# EAGLE board riffle-0.96-oneSideHole (EAGLE 7.3.0)

Size 100.1 x 18.03 mm. Coordinates in mm from the lower left corner, seen from the top.
Outline: 100.09,18.03 100.09,0.03 0,0 0,18.01 15.11,17.98
Outline: 15.11,17.98 100.1,18.03
Outline: 15.14,17.98 15.11,17.98
Copper layers (1*16): Top 0.0356mm / dielectric 1.5011mm / Bottom 0.0356mm
Design rules "LaenPCBOrder": minimum track width 6mil, minimum drill 13mil, track to track 6mil, track to pad 6mil, pad to pad 6mil, via to via 6mil, smd to smd 6mil, copper to edge 15mil, drill to drill 6mil, minimum pad ring 7mil, minimum via ring 7mil, stop-mask expansion 3mil, vias tented up to drill 0mil, thermal gap 10mil
Holes 2 mm at 16.81,1.45 16.41,9.27

## Footprints (pad centres in the part's own frame; a part is rotated, then mirrored left to right if it is on the bottom)
BATTCON_12MM_SMT = smd 2.4 x 4.3: P$1 0,11.96 | smd 2.4 x 4.2: P$2 0,-4.1 | hole 0.95: 0,7.5 | hole 1.25: 0,0
SOT-23 = smd 0.787 x 0.889: 1 0.025,-1.016; 2 -0.94,1.016; 3 0.991,1.016
0603-CAP = smd 1.1 x 1: 1 -0.85,0; 2 0.85,0
JST-PH-2-SMT-RA = smd 1 x 4.6: 1 1,-3.7; 2 -1,-3.7 | smd 1.6 x 3.4: NC1 -3.4,1.5; NC2 3.4,1.5
0603-LED = smd 0.8 x 0.9: MINUS -0.85,0; PLUS 0.85,0
SOD-123FL = smd 0.91 x 1.22: A 1.637,0; C -1.637,0
TQFP32-08 = smd 1.27 x 0.559: 1 -4.293,2.8; 2 -4.293,2; 3 -4.293,1.2; 4 -4.293,0.4; 5 -4.293,-0.4; 6 -4.293,-1.2; 7 -4.293,-2; 8 -4.293,-2.8; 17 4.293,-2.8; 18 4.293,-2; 19 4.293,-1.2; 20 4.293,-0.4; 21 4.293,0.4; 22 4.293,1.2; 23 4.293,2; 24 4.293,2.8 | smd 0.559 x 1.27: 9 -2.8,-4.293; 10 -2,-4.293; 11 -1.2,-4.293; 12 -0.4,-4.293; 13 0.4,-4.293; 14 1.2,-4.293; 15 2,-4.293; 16 2.8,-4.293; 25 2.8,4.293; 26 2,4.293; 27 1.2,4.293; 28 0.4,4.293; 29 -0.4,4.293; 30 -1.2,4.293; 31 -2,4.293; 32 -2.8,4.293
SOT23-5 = smd 0.55 x 1.2: 1 -0.95,-1.3; 2 0,-1.3; 3 0.95,-1.3; 4 0.95,1.3; 5 -0.95,1.3; 6 0,1.3
SO16 = smd 0.6 x 1.2: 1 -4.445,-2.8; 2 -3.175,-2.8; 3 -1.905,-2.8; 4 -0.635,-2.8; 5 0.635,-2.8; 6 1.905,-2.8; 7 3.175,-2.8; 8 4.445,-2.8; 9 4.445,2.8; 10 3.175,2.8; 11 1.905,2.8; 12 0.635,2.8; 13 -0.635,2.8; 14 -1.905,2.8; 15 -3.175,2.8; 16 -4.445,2.8
SOT89 = smd 0.58 x 1.2: 1 -1.5,-1.8; 2 0,-1.8; 3 1.5,-1.8 | smd 2 x 2: 4 0,1.3
SO-08 = smd 0.6 x 2.2: 1 -1.905,-2.6; 2 -0.635,-2.6; 3 0.635,-2.6; 4 1.905,-2.6; 5 1.905,2.6; 6 0.635,2.6; 7 -0.635,2.6; 8 -1.905,2.6
2X03 = drill 1.016 octagon: 1 -2.54,-1.27; 2 -2.54,1.27; 3 0,-1.27; 4 0,1.27; 5 2.54,-1.27; 6 2.54,1.27
AYZ0202 = smd 1 x 1.15: 1 -2.5,2.825; 2 0,2.825; 3 2.5,2.825; 4 -2.5,-2.825; 5 0,-2.825; 6 2.5,-2.825 | hole 0.85: 1.5,0; -1.5,0
1X02 = drill 1.016 long: 1 -1.27,0; 2 1.27,0
1X04-SMD = smd 1 x 3: 1 -3.81,5; 2 -1.27,5; 3 1.27,5; 4 3.81,5 | hole 1.4: -2.54,0; 2.54,0
2X07 = drill 1.016 octagon: 1 -7.62,-1.27; 2 -7.62,1.27; 3 -5.08,-1.27; 4 -5.08,1.27; 5 -2.54,-1.27; 6 -2.54,1.27; 7 0,-1.27; 8 0,1.27; 9 2.54,-1.27; 10 2.54,1.27; 11 5.08,-1.27; 12 5.08,1.27; 13 7.62,-1.27; 14 7.62,1.27
R1206 = smd 1.6 x 1.803: 1 -1.422,0; 2 1.422,0
0603-NO = smd 1.1 x 1: 1 -0.85,0; 2 0.85,0
DS3231 = smd 0.762 x 2.286: 1 -4.445,-5.08; 2 -3.175,-5.08; 3 -1.905,-5.08; 4 -0.635,-5.08; 5 0.635,-5.08; 6 1.905,-5.08; 7 3.175,-5.08; 8 4.445,-5.08; 9 4.445,5.08; 10 3.175,5.08; 11 1.905,5.08; 12 0.635,5.08; 13 -0.635,5.08; 14 -1.905,5.08; 15 -3.175,5.08; 16 -4.445,5.08
DM3D = smd 0.7 x 1.75: CD/DAT3 8.15,0.45; CLK 4.85,0.45; CMD 7.05,0.45; DAT0 2.65,0.45; DAT1 1.6,0.45; DAT2 9.25,0.45 | smd 0.8 x 1.5: GND1 0.05,8.15 | smd 0.8 x 1.4: GND2 11.95,8.8 | smd 1.4 x 1.5: GND3 11.65,0.55 | smd 1.3 x 1.5: GND4 0.35,0.55 | smd 1 x 1.55: SW_A 11.6,11.25 | smd 1.4 x 1: SW_B 0.35,9.65 | smd 0.7 x 2.032: VDD 5.95,0.45; VSS 3.75,0.45
USB-AB-MICRO-SMD_V02_BOSS = smd 1.4 x 0.4: D+1 2.7,0; D-1 2.7,0.65; GND1 2.7,-1.3; ID1 2.7,-0.65; VBUS1 2.7,1.3 | hole 0.85: 2.2,1.9; 2.2,-1.9
RESONATOR-SMD = smd 0.7 x 1.7: 1 -1.2,0; 2 0,0; 3 1.2,0

## Placement (x,y rotation side)
BAT  CR1220  [BATTCON_12MM_SMT]  30.08,8.34 70 top
BATTPOWER  FDN340P  [SOT-23]  48.79,8.53 0 top
C1  10uF  [0603-CAP]  33.01,16.84 0 top
C2  0.1uF  [0603-CAP]  26.23,1.04 180 top
C3  0.1uF  [0603-CAP]  49.49,5.13 270 top
C4  10uF  [0603-CAP]  13.66,15.07 90 top
C5  10uF  [0603-CAP]  57.59,11.63 0 top
C6  10uF  [0603-CAP]  60.79,11.63 180 top
C7  0.1uF  [0603-CAP]  42.95,14.91 0 top
C8  0.1uF  [0603-CAP]  80.55,9.06 90 top
C9  0.1uF  [0603-CAP]  80.82,15.73 90 top
C10  0.1uF  [0603-CAP]  78.41,1.25 0 top
C11  0.1uF  [0603-CAP]  80.33,4.3 90 top
CN1  [JST-PH-2-SMT-RA]  9.24,4.8 90 top
D1  LED0603  [0603-LED]  34.62,2.02 270 top
D2  LED0603  [0603-LED]  64.72,7.9 90 top
D3  SCHOTTKY  [SOD-123FL]  37.54,8.27 270 top
D4  SCHOTTKY  [SOD-123FL]  37.94,16.71 180 top
IC1  ATMEGA328P  [TQFP32-08]  72.26,6.33 45 top
IC2  MCP73831  [SOT23-5]  38.09,12.96 180 top
IC3  CH340G  [SO16]  42.99,5.43 270 top
IC4  MCP1700-33  [SOT89]  54.69,14.93 180 top
IC5  24AA128SN  [SO-08]  61.19,15.13 90 top
IC6  MCP1700-33  [SOT89]  9.88,14.92 180 top
ISP  [2X03]  69.19,15.13 180 top
J1  AYZ0202  [AYZ0202]  48.49,14.03 270 top
JP1  [1X02]  17.79,16.06 0 top
JP3  [1X04-SMD]  59.23,5.56 270 bottom
JP5  [2X07]  97.43,9.03 270 top
L1  500mA  [R1206]  10.68,10.84 0 top
R1  10K  [0603-NO]  21.37,1.04 180 top
R2  4.7K  [0603-NO]  43.05,11.61 180 top
R3  10K  [0603-NO]  54.29,11.73 0 top
R4  10K  [0603-NO]  65.81,10.85 180 top
R5  10K  [0603-NO]  42.74,13.29 180 top
R6  10K  [0603-NO]  42.91,16.68 180 top
R7  50K  [0603-NO]  77.67,15.73 270 top
R8  50K  [0603-NO]  79.27,15.7 90 top
R9  10K  [0603-NO]  48.49,2.83 180 top
R10  10K  [0603-NO]  48.49,1.13 180 top
REMOTE  FDN340P  [SOT-23]  78.2,11.5 0 top
RTC-DS3231  DS3231  [DS3231]  56.99,5.43 270 top
SDPWER  FDN340P  [SOT-23]  75.09,15.73 180 top
U$1  MICROSD-HRS_DM3D  [DM3D]  94.04,13.03 180 top
U$4  [USB-AB-MICRO-SMD_V02_BOSS]  2.4,13.11 0 top
X2  12MHz  [RESONATOR-SMD]  37.64,2.61 90 top
X3  16 MHz  [RESONATOR-SMD]  66.15,2.32 315 top

## Library data of the parts
BAT IC2 IC3 J1 X2 = SparkFunNew
BATTPOWER REMOTE SDPWER = zetex; OC_FARNELL: unknown; OC_NEWARK: unknown
C1-C11 JP3 X3 = SparkFun
CN1 D3 D4 IC4 IC6 L1 = adafruit
D1 D2 = LowPowerLab
IC1 = atmel; MPN: ATMEGA8-16AU; OC_FARNELL: 9171371; OC_NEWARK: 73M8863
IC5 = microchip; MF: MICROCHIP; MPN: 24AA128-I/SN; OC_FARNELL: unknown; OC_NEWARK: 92C6842
ISP JP1 JP5 = pinhead
R1-R10 = microbuilder
RTC-DS3231 = _lh-library
U$1 = hrs_DM3D-SF
U$4 = Testing

## Nets
A0: IC1.23 JP5.13
A1: IC1.24 JP3.1
A2: IC1.25 JP3.2
A3: IC1.26 R5.2 R6.1
AREF: C10.1 IC1.20
D2: IC1.32 JP5.7
D3: IC1.1 JP5.5
D4: BATTPOWER.3 IC1.2
D5: IC1.9 JP3.4
D6: IC1.10 SDPWER.3
D7: IC1.11 U$1.CD/DAT3
D8: IC1.12 REMOTE.3
D9: IC1.13 R4.2
D10: IC1.14 JP5.2
D+: IC3.5 U$4.D+1
D-: IC3.6 U$4.D-1
GND: BAT.P$1 C1.1 C2.2 C4.2 C5.2 C6.2 C7.1 C8.2 C9.1 C10.2 C11.1 CN1.2 D2.MINUS IC1.3 IC1.5 IC1.21 IC2.2 IC3.1 IC4.1 IC5.1 IC5.2 IC5.3 IC5.4 IC5.7 IC6.1 ISP.6 JP1.1 JP3.3 JP5.1 R2.1 R5.1 RTC-DS3231.5 RTC-DS3231.6 RTC-DS3231.7 RTC-DS3231.8 RTC-DS3231.9 RTC-DS3231.10 RTC-DS3231.11 RTC-DS3231.12 RTC-DS3231.13 U$1.GND1 U$1.GND2 U$1.GND3 U$1.GND4 U$1.SW_A U$1.SW_B U$1.VSS U$4.GND1 X2.2 X3.2
MISO: IC1.16 ISP.1 JP5.4 U$1.DAT0
MOSI: IC1.15 ISP.4 JP5.6 U$1.CMD
N$1: D1.PLUS R1.1
N$2: IC1.7 X3.1
N$3: IC1.8 X3.3
N$4: C9.2 R7.1 R8.2 SDPWER.1 U$1.VDD
N$5: D1.MINUS IC2.1
N$6: IC2.5 R2.2
N$7: C8.1 JP5.3 REMOTE.1
N$8: C2.1 IC3.4 IC3.16 IC6.3
N$10: D3.A L1.2
N$11: IC3.7 X2.1
N$13: IC3.8 X2.3
N$14: D4.A JP1.2
N$15: BATTPOWER.1 C7.2 R6.2
N$16: R7.2 U$1.DAT1
N$17: D2.PLUS R4.1
N$18: R8.1 U$1.DAT2
N$19: L1.1 U$4.VBUS1
RESET: C3.1 IC1.29 ISP.5 R3.1
RST: C3.2 IC3.14
RTC_BATT: BAT.P$2 RTC-DS3231.14
RXD: IC1.30 IC3.2 JP5.10
SCK: IC1.17 ISP.3 JP5.8 U$1.CLK
SCL: IC1.28 IC5.6 JP5.11 R9.1 RTC-DS3231.16
SDA: IC1.27 IC5.5 JP5.9 R10.1 RTC-DS3231.15
TXD: IC1.31 IC3.3 JP5.12
VBAT [vcc]: BATTPOWER.2 CN1.1 D4.C IC2.3 J1.2 JP5.14
VBUS [vcc]: C1.2 C4.1 D3.C IC2.4 IC6.2 ISP.2 R1.2
VCC: C6.1 C11.2 IC1.4 IC1.6 IC1.18 IC4.3 IC5.8 R3.2 R9.2 R10.2 REMOTE.2 RTC-DS3231.2 SDPWER.2
VDD: C5.1 IC4.2 J1.1

## Tracks (layer width: path | path; a pad name or v marks a point on that pad's centre or on a via)
A0  (1 unrouted)
A1  (1 unrouted)
A2  (1 unrouted)
A3  (2 unrouted)
AREF  (1 unrouted)
D2  (1 unrouted)
D3  (1 unrouted)
D4  (1 unrouted)
D5  (1 unrouted)
D6  (1 unrouted)
D7  (1 unrouted)
D8  (1 unrouted)
D9  (1 unrouted)
D10  (1 unrouted)
D+  (1 unrouted)
D-  (1 unrouted)
GND  (49 unrouted)
MISO  (3 unrouted)
MOSI  (3 unrouted)
N$1  (1 unrouted)
N$2  (1 unrouted)
N$3  (1 unrouted)
N$4  (4 unrouted)
N$5  (1 unrouted)
N$6  (1 unrouted)
N$7  (2 unrouted)
N$8  (3 unrouted)
N$10  (1 unrouted)
N$11  (1 unrouted)
N$13  (1 unrouted)
N$14  (1 unrouted)
N$15  (2 unrouted)
N$16  (1 unrouted)
N$17  (1 unrouted)
N$18  (1 unrouted)
N$19  (1 unrouted)
RESET  (3 unrouted)
RST  (1 unrouted)
RTC_BATT  (1 unrouted)
RXD  (2 unrouted)
SCK  (3 unrouted)
SCL  (4 unrouted)
SDA  (4 unrouted)
TXD  (2 unrouted)
VBAT  (5 unrouted)
VBUS  (6 unrouted)
VCC  (12 unrouted)
VDD  (2 unrouted)

## Text on the board
tPlace: CHG | ON | eeprom | RST | SCK | MISO | IC2 | GND | MOSI | VBUS | OFF | battpwr | 328p | CH340G | X2 | ACT
bPlace: RIFFLE-328p ver 0.95 | VBAT | A0 | TX | SCL | RX | SDA | SCK | MOSI | D3 | D2 | MISO | 3V3 | D10 | GND | A1 | A2 | D4 | publiclab.org/wiki/riffle | D5